# EAGLE board placa_inferior (EAGLE 4.09)
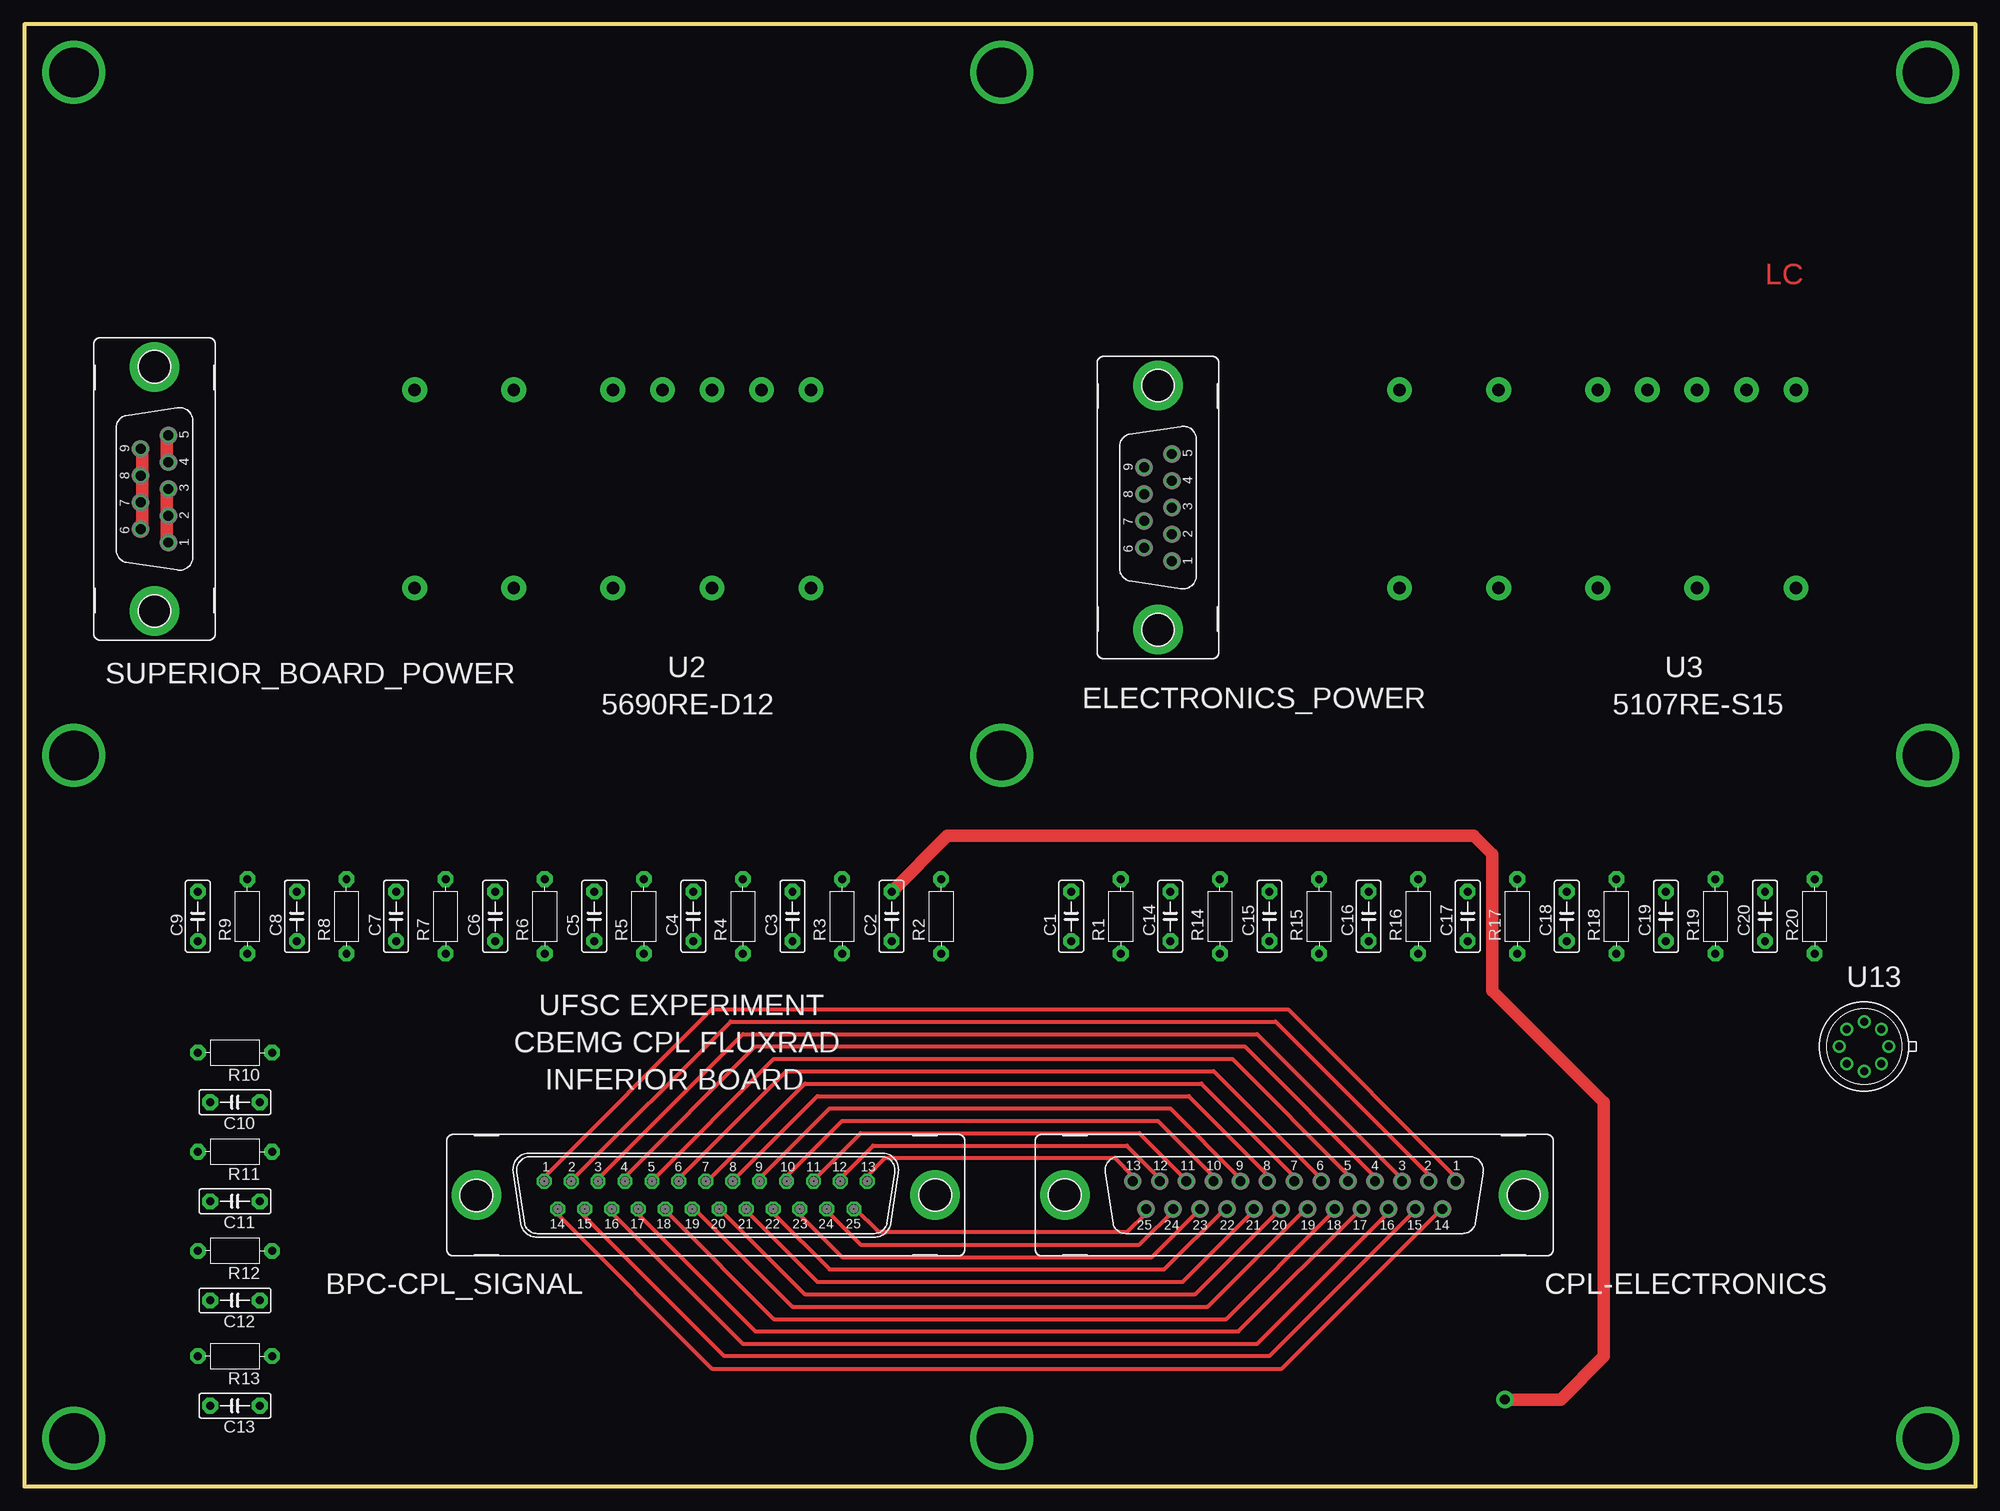
[diagram p0: board, top side]
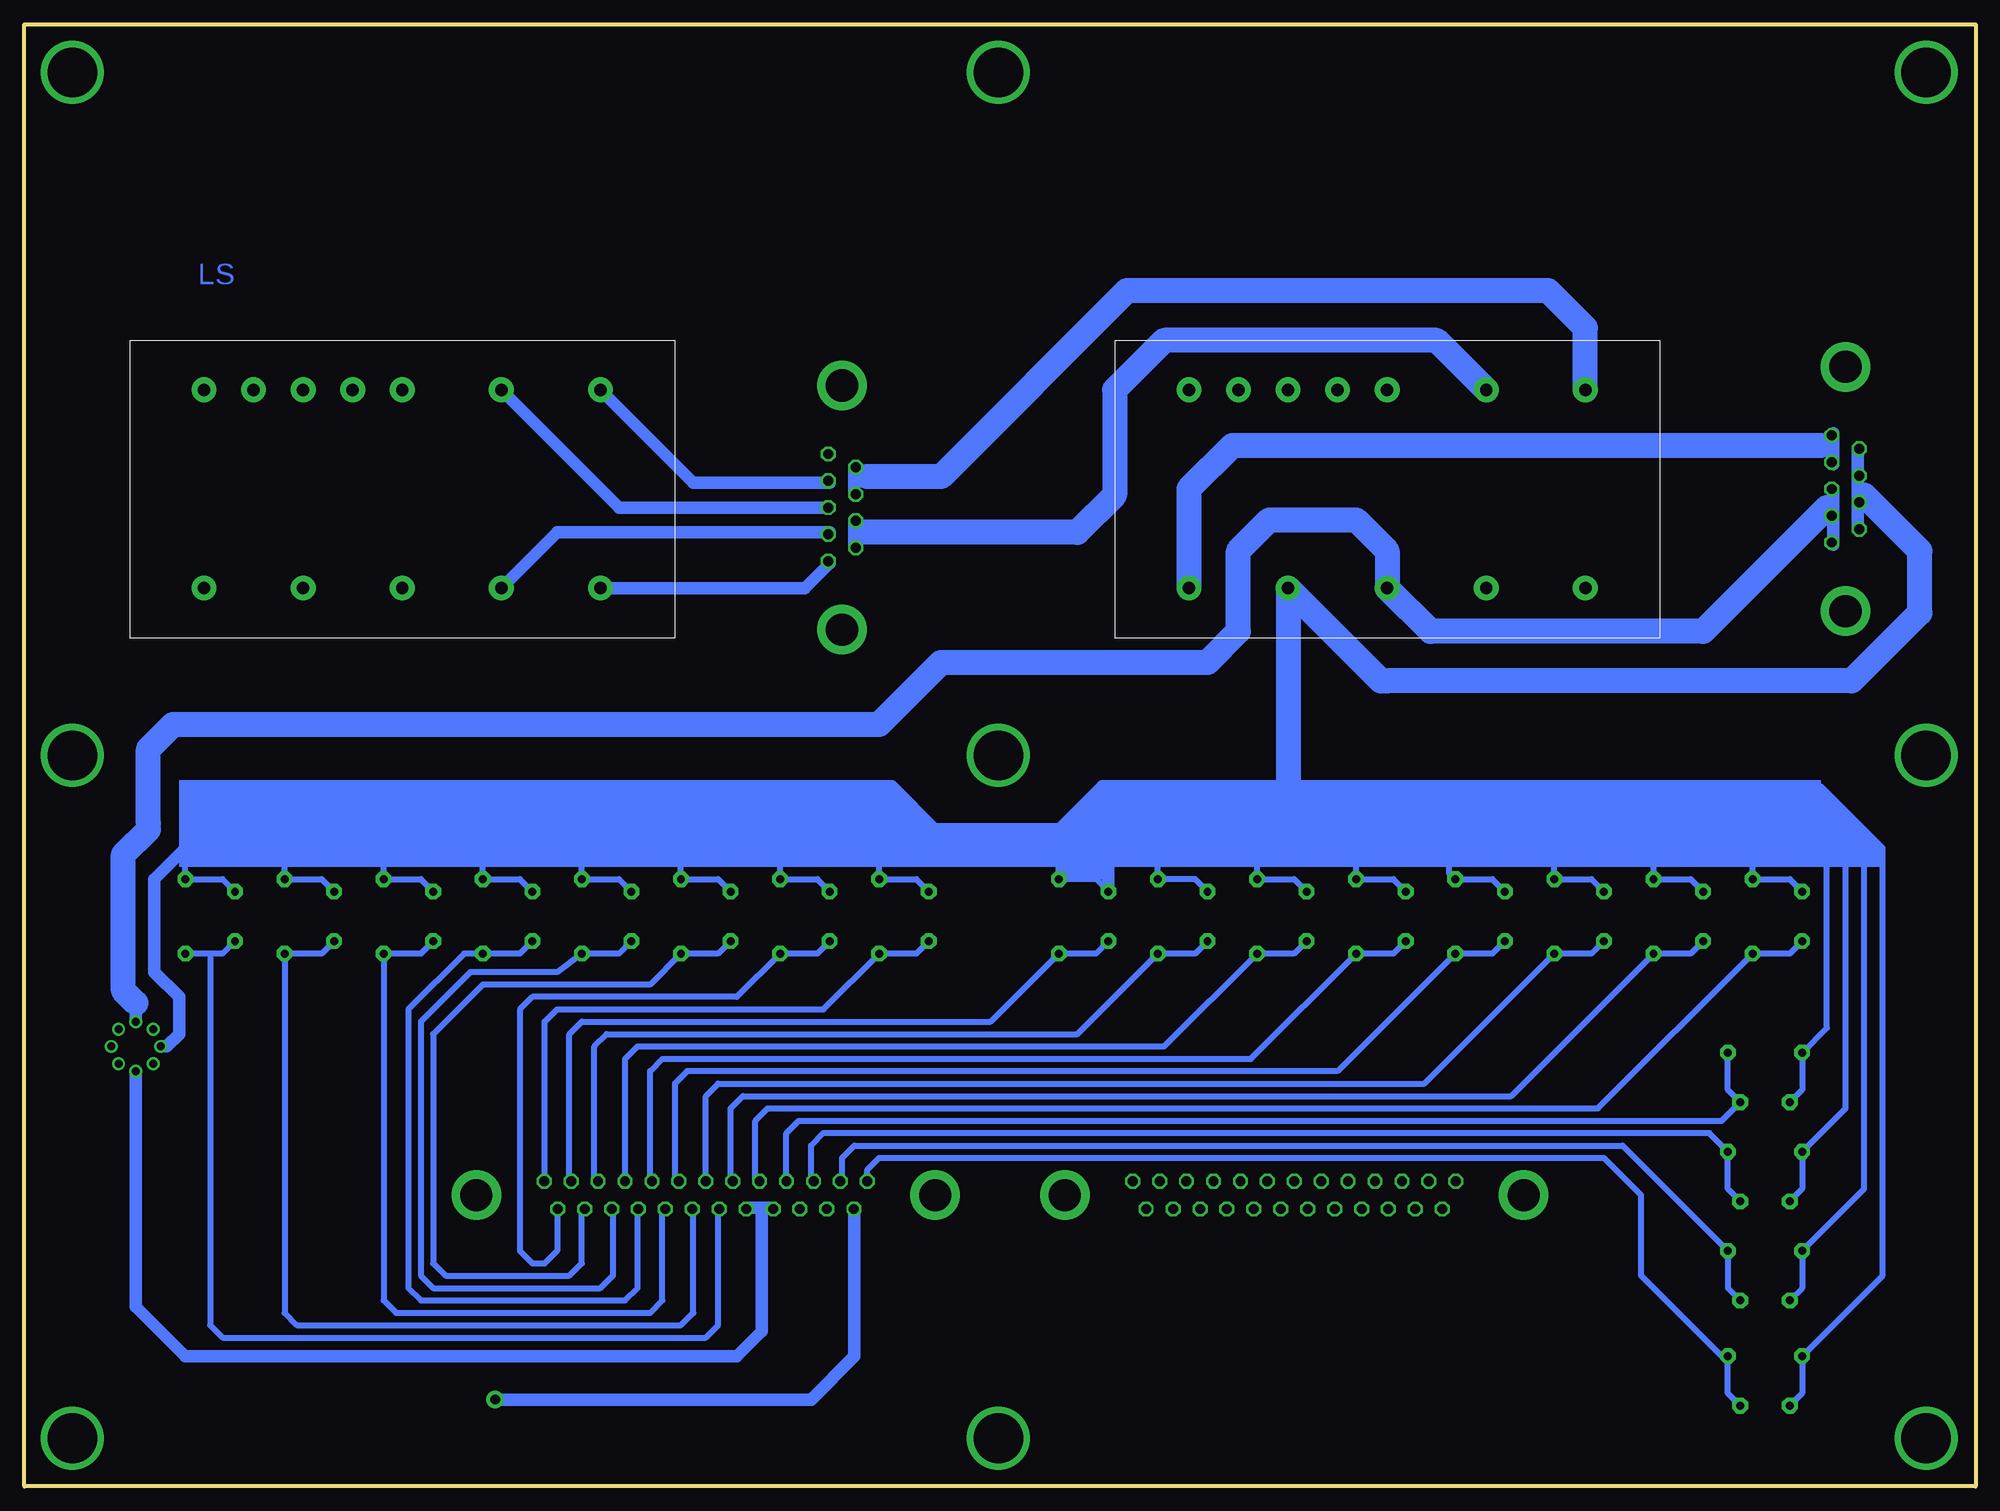
[diagram p1: board, bottom side, seen from below]

Size 200.03 x 149.86 mm. Coordinates in mm from the lower left corner, seen from the top.
Outline: 0,0 200.03,0 200.03,149.86 0,149.86 0,0
Copper layers used: Top, Bottom

## Footprints (pad centres in the part's own frame; a part is rotated, then mirrored left to right if it is on the bottom)
M25VP = drill 1.016 octagon: 1 -16.561,1.422; 2 -13.792,1.422; 3 -11.049,1.422; 4 -8.28,1.422; 5 -5.512,1.422; 6 -2.769,1.422; 7 0,1.422; 8 2.769,1.422; 9 5.512,1.422; 10 8.28,1.422; 11 11.049,1.422; 12 13.792,1.422; 13 16.561,1.422; 14 -15.189,-1.422; 15 -12.421,-1.422; 16 -9.652,-1.422; 17 -6.909,-1.422; 18 -4.14,-1.422; 19 -1.372,-1.422; 20 1.372,-1.422; 21 4.14,-1.422; 22 6.909,-1.422; 23 9.652,-1.422; 24 12.421,-1.422; 25 15.189,-1.422 | drill 3.302 pad 5.08 round: G1 -23.52,0; G2 23.52,0
C5B2.5 = drill 0.813 pad 1.6 octagon: 1 -2.54,0; 2 2.54,0
F25VP = drill 1.016 octagon: 1 16.561,1.422; 2 13.792,1.422; 3 11.049,1.422; 4 8.28,1.422; 5 5.512,1.422; 6 2.769,1.422; 7 0,1.422; 8 -2.769,1.422; 9 -5.512,1.422; 10 -8.28,1.422; 11 -11.049,1.422; 12 -13.792,1.422; 13 -16.561,1.422; 14 15.189,-1.422; 15 12.421,-1.422; 16 9.652,-1.422; 17 6.909,-1.422; 18 4.14,-1.422; 19 1.372,-1.422; 20 -1.372,-1.422; 21 -4.14,-1.422; 22 -6.909,-1.422; 23 -9.652,-1.422; 24 -12.421,-1.422; 25 -15.189,-1.422 | drill 3.302 pad 5.08 round: G1 -23.52,0; G2 23.52,0
F09VP = drill 1.016 octagon: 1 5.486,1.422; 2 2.743,1.422; 3 0,1.422; 4 -2.743,1.422; 5 -5.486,1.422; 6 4.115,-1.422; 7 1.372,-1.422; 8 -1.372,-1.422; 9 -4.115,-1.422 | drill 3.302 pad 5.08 round: G1 -12.522,0; G2 12.522,0
R-7,5 = drill 0.813 pad 1.6 octagon: 1 -3.81,0; 2 3.81,0
5690 = drill 1.27 pad 2.54 round: 1 -20.32,-10.16; 2 -15.24,-10.16; 3 -10.16,-10.16; 4 -5.08,-10.16; 5 0,-10.16; 6 10.16,-10.16; 7 20.32,-10.16; 8 20.32,10.16; 9 10.16,10.16; 10 0,10.16; 11 -10.16,10.16; 12 -20.32,10.16
TO99 = drill 0.813 round: 1 -1.778,-1.778; 2 0,-2.54; 3 1.778,-1.778; 4 2.54,0; 5 1.778,1.778; 6 0,2.54; 7 -1.778,1.778; 8 -2.54,0

## Placement (x,y rotation side)
BPC-CPL_SIGNAL  [M25VP]  69.85,29.84 0 top
C1  [C5B2.5]  107.32,58.42 90 top
C2  [C5B2.5]  88.9,58.42 90 top
C3  [C5B2.5]  78.74,58.42 90 top
C4  [C5B2.5]  68.58,58.42 90 top
C5  [C5B2.5]  58.42,58.42 90 top
C6  [C5B2.5]  48.26,58.42 90 top
C7  [C5B2.5]  38.1,58.42 90 top
C8  [C5B2.5]  27.94,58.42 90 top
C9  [C5B2.5]  17.78,58.42 90 top
C10  [C5B2.5]  21.59,39.37 180 top
C11  [C5B2.5]  21.59,29.21 180 top
C12  [C5B2.5]  21.59,19.05 180 top
C13  [C5B2.5]  21.59,8.25 180 top
C14  [C5B2.5]  117.48,58.42 90 top
C15  [C5B2.5]  127.64,58.42 90 top
C16  [C5B2.5]  137.8,58.42 90 top
C17  [C5B2.5]  147.95,58.42 90 top
C18  [C5B2.5]  158.12,58.42 90 top
C19  [C5B2.5]  168.28,58.42 90 top
C20  [C5B2.5]  178.44,58.42 90 top
CPL-ELECTRONICS  [F25VP]  130.18,29.84 0 top
ELECTRONICS_POWER  [F09VP]  116.2,100.33 270 top
R1  [R-7,5]  112.39,58.42 90 top
R2  [R-7,5]  93.98,58.42 90 top
R3  [R-7,5]  83.82,58.42 90 top
R4  [R-7,5]  73.66,58.42 90 top
R5  [R-7,5]  63.5,58.42 90 top
R6  [R-7,5]  53.34,58.42 90 top
R7  [R-7,5]  43.18,58.42 90 top
R8  [R-7,5]  33.02,58.42 90 top
R9  [R-7,5]  22.86,58.42 90 top
R10  [R-7,5]  21.59,44.45 180 top
R11  [R-7,5]  21.59,34.29 180 top
R12  [R-7,5]  21.59,24.13 180 top
R13  [R-7,5]  21.59,13.33 180 top
R14  [R-7,5]  122.55,58.42 90 top
R15  [R-7,5]  132.72,58.42 90 top
R16  [R-7,5]  142.88,58.42 90 top
R17  [R-7,5]  153.04,58.42 90 top
R18  [R-7,5]  163.19,58.42 90 top
R19  [R-7,5]  173.36,58.42 90 top
R20  [R-7,5]  183.52,58.42 90 top
SUPERIOR_BOARD_POWER  [F09VP]  13.34,102.23 270 top
U2  5690RE-D12  [5690]  60.33,102.23 180 top
U3  5107RE-S15  [5690]  161.29,102.23 180 top
U13  LT1019AMH-5  [TO99]  188.6,45.09 180 top

## Library data of the parts
BPC-CPL_SIGNAL CPL-ELECTRONICS ELECTRONICS_POWER SUPERIOR_BOARD_POWER = con-subd
C1-C20 = capacitor-wima
R1-R20 = discrete
U2 U3 = mdipower
U13 = burr-brown

## Nets
S$10: C20.1 R20.1
S$11: C19.1 R19.1
S$12: C18.1 R18.1
S$13: C17.1 R17.1
S$14: C1.1 R1.1
S$15: C15.1 R15.1
S$16: C2.1 R2.1
S$18: C14.1 R14.1
S$19: C16.1 R16.1
S$24: C6.1 R6.1
S$30: U3.8
S$39: U2.11
S$42: C3.1 R3.1
S$43: C4.1 R4.1
S$44: C5.1 R5.1
S$45: C7.1 R7.1
S$46: C8.1 R8.1
S$47: C9.1 R9.1
S$48: C10.1 R10.1
S$49: C11.1 R11.1
S$50: C12.1 R12.1
S$51: C13.1 R13.1
S$52: C20.2 R20.2
S$53: C19.2 R19.2
S$54: C18.2 R18.2
S$55: C17.2 R17.2
S$56: C16.2 R16.2
S$57: C15.2 R15.2
S$58: C14.2 R14.2
S$59: C1.2 R1.2
S$61: C3.2 R3.2
S$62: C4.2 R4.2
S$63: C5.2 R5.2
S$64: C6.2 R6.2
S$65: C7.2 R7.2
S$66: C8.2 R8.2
S$67: C9.2 R9.2
S$68: C10.2 R10.2
S$69: C11.2 R11.2
S$70: C12.2 R12.2
S$71: C13.2 R13.2
S$72: U13.4
S$73: U13.2
S$74: U13.6
S$77: U2.10
S$78: U3.9
S$79: U3.7
S$80: U3.6
S$81: U2.6
S$82: U2.7
S$112: C2.2 R2.2

## Tracks (layer width: path | path; a pad name or v marks a point on that pad's centre or on a via)
S$1  (via drill 5.08 pad 6.45)
  other vias: 100.17,144.94
S$2  (via drill 5.08 pad 6.45)
  other vias: 195.1,144.94
S$3  (via drill 5.08 pad 6.45)
  other vias: 5.08,144.94
S$4  (via drill 5.08 pad 6.45)
  other vias: 100.17,74.93
S$5  (via drill 5.08 pad 6.45)
  other vias: 195.1,74.93
S$6  (via drill 5.08 pad 6.45)
  other vias: 5.08,74.93
S$7  (via drill 5.08 pad 6.45)
  other vias: 195.1,4.92
S$8  (via drill 5.08 pad 6.45)
  other vias: 100.17,4.92
S$9  (via drill 5.08 pad 6.45)
  other vias: 5.08,4.92
S$10
  Bottom 0.61: C20.1 179.71,54.61 180.98,54.61 | 180.98,54.61 R20.1 | 180.98,54.61 180.98,16.51 179.71,15.24 130.18,15.24 128.91,16.51 128.91,28.57
S$11
  Bottom 0.61: C19.1 169.55,54.61 R19.1 173.36,17.78 172.08,16.51 132.72,16.51 131.44,17.78 131.44,28.57
S$12
  Bottom 0.61: C18.1 159.38,54.61 R18.1 163.19,19.05 161.93,17.78 135.89,17.78 134.62,19.05 134.62,27.94
S$13
  Bottom 0.61: C17.1 149.23,54.61 R17.1 154.94,54.61 160.66,48.89 160.66,20.32 159.38,19.05 138.43,19.05 137.16,20.32 137.16,27.94
S$14
  Bottom 0.61: 146.69,31.12 146.69,47.62 145.42,48.89 118.11,48.89 R1.1 108.58,54.61 C1.1
S$15
  Bottom 0.61: C15.1 128.91,54.61 R15.1 135.89,51.44 153.04,51.44 158.12,46.35 158.12,22.86 156.85,21.59 144.14,21.59 142.88,22.86 142.88,28.57
S$16
  Bottom 0.61: 144.14,31.75 144.14,46.35 142.88,47.62 100.97,47.62 R2.1 90.17,54.61 C2.1
S$17
  Bottom 0.61: 12.07,64.77 12.07,65.41 15.88,69.22
S$18
  Bottom 0.61: 145.42,28.57 145.42,24.13 146.69,22.86 147.95,22.86 149.23,24.13 149.23,48.89 147.95,50.16 127,50.16 R14.1 118.75,54.61 C14.1
S$19
  Bottom 0.61: 139.7,27.94 139.7,21.59 140.97,20.32 158.12,20.32 159.38,21.59 159.38,47.62 154.31,52.7 145.42,52.7 R16.1 139.06,54.61 C16.1
S$20
  Bottom 0.61: 12.7,65.41 15.88,68.58
S$21
  Bottom 0.61: 13.34,65.41 15.88,67.94
S$22
  Bottom 0.61: 13.97,65.41 15.88,67.31
S$23
  Bottom 0.61: 14.61,65.41 15.88,66.67
S$24
  Bottom 0.61: C6.1 49.53,54.61 R6.1 65.41,42.54 132.08,42.54 133.35,41.28 133.35,31.75 132.72,31.12
S$25
  Bottom 0.61: 15.24,65.41 15.88,66.04 15.88,65.41
S$26
  Bottom 1.27: 88.9,71.75 89.54,71.75 93.98,67.31
S$27
  Bottom 1.27: 111.76,71.75 111.13,71.75 106.68,67.31
S$28
  Bottom 1.27: 108.58,67.31 108.58,67.94 111.13,70.48
S$29
  Bottom 1.27: 109.86,67.31 109.86,67.94 111.13,69.22 111.13,67.94
S$30
  Bottom 1.27: U3.8 120.02,92.07 117.48,94.62
S$31
  Bottom 1.27: 14.61,102.23 14.61,96.52
S$32
  Bottom 1.27: 14.61,107.95 14.61,104.78
S$33
  Bottom 2.54: 11.43,101.6 5.72,95.88 5.72,89.53 12.7,82.55 60.33,82.55
S$34
  Bottom 2.54: 15.88,106.68 76.2,106.68 80.64,102.23 80.64,92.07
S$35
  Top 1.27: 12.07,106.04 12.07,98.42
S$36
  Top 1.27: 14.61,107.31 14.61,105.41
S$37
  Top 1.27: 14.61,102.23 14.61,96.52
S$38
  Bottom 1.27: 12.07,106.04 12.07,98.42
S$39
  Bottom 2.54: 60.96,82.55 U2.11 70.48,71.75
S$40
  Bottom 1.27: 88.9,70.48 89.54,70.48 92.71,67.31
S$41
  Bottom 1.27: 89.54,69.22 90.8,67.94 89.54,67.94
S$42
  Bottom 0.61: 141.61,31.12 141.61,45.09 140.33,46.35 92.08,46.35 R3.1 80.01,54.61 C3.1
S$43
  Bottom 0.61: 138.43,31.12 138.43,43.81 137.16,45.09 83.19,45.09 R4.1 69.85,54.61 C4.1
S$44
  Bottom 0.61: 135.89,31.75 135.89,42.54 134.62,43.81 74.3,43.81 R5.1 59.69,54.61 C5.1
S$45
  Bottom 0.61: 130.18,31.12 130.18,40 128.91,41.28 56.52,41.28 R7.1 39.37,54.61 C7.1
S$46
  Bottom 0.61: 127.64,31.12 127.64,38.73 126.36,40 47.62,40 R8.1 29.21,54.61 C8.1
S$47
  Bottom 0.61: 125.1,31.12 125.1,37.47 123.83,38.73 38.73,38.73 R9.1 19.05,54.61 C9.1
S$48
  Bottom 0.61: 121.92,31.75 121.92,36.19 120.65,37.47 26.04,37.47 C10.1 25.4,40.64 R10.1
S$49
  Bottom 0.61: C11.1 25.4,30.48 R11.1 27.31,36.19 118.11,36.19 119.38,34.92
S$50
  Bottom 0.61: 116.2,31.12 116.2,33.66 114.94,34.92 36.2,34.92 R12.1 25.4,20.32 C12.1
S$51
  Bottom 0.61: 113.67,31.75 113.67,32.38 112.39,33.66 38.1,33.66 34.29,29.84 34.29,21.59 26.04,13.33 R13.1 25.4,9.52 C13.1
S$52
  Bottom 0.61: C20.2 179.71,62.23 R20.2 183.52,64.13
S$53
  Bottom 0.61: C19.2 169.55,62.23 R19.2 173.36,64.13
S$54
  Bottom 0.61: C18.2 159.38,62.23 R18.2 163.19,64.13
S$55
  Bottom 0.61: C17.2 149.23,62.23 R17.2 153.04,64.13
S$56
  Bottom 0.61: C16.2 139.06,62.23 R16.2 142.88,64.13
S$57
  Bottom 0.61: C15.2 128.91,62.23 R15.2 132.72,64.13
S$58
  Bottom 0.61: C14.2 118.75,62.23 R14.2 122.55,64.13
S$59
  Bottom 0.61: C1.2 108.58,62.23 R1.2 112.39,64.13
S$61
  Bottom 0.61: C3.2 80.01,62.23 R3.2 83.82,64.13
S$62
  Bottom 0.61: C4.2 69.85,62.23 R4.2 73.66,64.77
S$63
  Bottom 0.61: C5.2 59.69,62.23 R5.2 63.5,64.13
S$64
  Bottom 0.61: C6.2 49.53,62.23 R6.2 53.98,62.87 53.98,64.13
S$65
  Bottom 0.61: C7.2 39.37,62.23 R7.2 43.18,64.13
S$66
  Bottom 0.61: C8.2 29.21,62.23 R8.2 33.02,64.13
S$67
  Bottom 0.61: C9.2 19.05,62.23 R9.2 22.86,64.13
S$68
  Bottom 0.61: C10.2 17.78,40.64 R10.2 15.24,46.99 15.24,64.13
S$69
  Bottom 0.61: C11.2 17.78,30.48 R11.2 13.34,38.73 13.34,64.13
S$70
  Bottom 0.61: C12.2 17.78,20.32 R12.2 11.43,30.48 11.43,64.13
S$71
  Bottom 0.61: C13.2 17.78,9.52 R13.2 9.53,21.59 9.53,64.77 | 9.53,64.77 9.53,65.41 15.88,71.75 | 9.53,64.77 10.16,65.41 | 10.16,65.41 15.88,71.12 | 10.16,65.41 10.8,65.41 | 10.8,65.41 15.88,70.48 | 10.8,65.41 11.43,65.41 15.88,69.85
S$72
  Bottom 1.27: U13.4 185.42,45.09 184.15,46.35 184.15,50.16 186.69,52.7 186.69,62.23 183.52,65.41
S$73
  Bottom 1.27: U13.2 188.6,48.89
S$74
  Bottom 1.27: U13.6 188.6,18.41 183.52,13.33 127,13.33 124.46,15.88 124.46,28.57
S$75
  Bottom 1.27: 123.19,28.57 125.73,28.57
S$76
  Bottom 2.54: 187.33,67.31 189.87,64.77 189.87,50.8 188.6,49.53
S$77
  Bottom 2.54: 187.33,67.94 187.33,75.56 184.79,78.1 112.39,78.1 106.05,84.45 78.74,84.45 75.57,87.63 75.57,95.88 72.39,99.06 63.5,99.06 60.33,95.88 U2.10 55.88,87.63 27.94,87.63 15.24,100.33
S$78
  Bottom 1.27: 117.48,97.79 145.42,97.79 U3.9
S$79
  Bottom 1.27: 117.48,102.87 131.44,102.87 U3.7
S$80
  Bottom 1.27: 117.48,100.33 139.06,100.33 U3.6
S$81
  Bottom 2.54: U2.6 55.25,117.47 83.19,117.47 88.27,112.39 88.27,101.6 92.08,97.79 114.3,97.79
S$82
  Bottom 2.54: U2.7 40.01,118.75 43.82,122.56 87,122.56 106.05,103.5 113.67,103.5
S$83
  Bottom 1.27: 114.94,104.14 114.94,101.6
S$84
  Bottom 1.27: 114.94,99.06 114.94,96.52
S$85
  Top 0.406: 86.36,31.75 88.27,33.66 111.76,33.66 113.67,31.75 113.67,31.12
S$86
  Top 0.406: 114.94,27.94 113.03,26.03 87.63,26.03 85.09,28.57
S$87
  Top 0.406: 82.55,27.94 85.73,24.77 114.3,24.77 118.11,28.57
S$88
  Top 0.406: 79.38,27.94 83.82,23.49 115.57,23.49 120.65,28.57
S$89
  Top 0.406: 76.83,27.94 82.55,22.22 116.84,22.22 123.19,28.57
S$90
  Top 0.406: 74.3,28.57 74.3,27.94 81.28,20.95 118.75,20.95 125.73,27.94
S$91
  Top 0.406: 71.12,28.57 80.01,19.69 120.02,19.69 128.91,28.57
S$92
  Top 0.406: 68.58,28.57 78.74,18.41 121.29,18.41 131.44,28.57
S$93
  Top 0.406: 66.04,27.94 76.83,17.14 123.19,17.14 133.99,27.94
S$94
  Bottom 0.61: 119.38,31.12 119.38,34.92
S$95
  Top 0.406: 62.86,27.94 74.93,15.88 124.46,15.88 137.16,28.57
S$96
  Top 0.406: 60.33,28.57 60.33,27.94 73.66,14.6 126.36,14.6 140.33,28.57
S$97
  Top 0.406: 142.88,27.94 142.24,27.94 127.64,13.33 71.76,13.33 57.15,27.94
S$98
  Top 0.406: 54.61,28.57 54.61,27.94 70.48,12.06 128.91,12.06 145.42,28.57
S$99
  Top 0.406: 83.82,31.12 83.82,31.75 87,34.92 113.03,34.92 116.2,31.75
S$100
  Top 0.406: 80.64,31.75 81.28,31.75 85.73,36.19 114.3,36.19 119.38,31.12
S$101
  Top 0.406: 78.11,31.75 83.82,37.47 116.2,37.47 121.92,31.75
S$102
  Top 0.406: 74.93,31.12 82.55,38.73 117.48,38.73 124.46,31.75
S$103
  Top 0.406: 72.39,31.12 81.28,40 119.38,40 127.64,31.75
S$104
  Top 0.406: 69.85,31.12 80.01,41.28 120.65,41.28 130.18,31.75
S$105
  Top 0.406: 67.31,31.12 67.31,31.75 78.11,42.54 121.92,42.54 132.72,31.75
S$106
  Top 0.406: 64.14,31.12 76.83,43.81 123.83,43.81 135.89,31.75
S$107
  Top 0.406: 61.6,31.12 61.6,31.75 74.93,45.09 125.1,45.09 138.43,31.75
S$108
  Top 0.406: 58.42,31.12 73.66,46.35 126.36,46.35 140.97,31.75
S$109
  Top 0.406: 55.88,31.12 72.39,47.62 128.27,47.62 144.14,31.75
S$110
  Top 0.406: 53.34,31.12 53.34,31.75 70.48,48.89 129.54,48.89 146.69,31.75
S$111
  Bottom 1.27: 114.94,28.57 114.94,13.33 119.38,8.89 151.13,8.89
S$112  (via drill 1.02 pad 1.78)
  Top 1.27: v151.76,8.89 157.48,8.89 161.93,13.33 161.93,39.37 150.5,50.8 150.5,64.77 148.59,66.67 94.61,66.67 C2.2
  Bottom 0.61: 93.98,64.13 R2.2 90.17,62.23 C2.2
  Bottom 1.27: 93.35,63.5 88.9,63.5 C2.2
S$113
  Bottom 1.27: 89.54,62.87 92.71,62.87
(copper drawn outside any net)
  shapes: Bottom area x4

## Text on the board
Top: LC
Bottom: LS
tNames: UFSC EXPERIMENT | CBEMG CPL FLUXRAD | INFERIOR BOARD